# Altium PCB anssipv2.PcbDoc
Units mm, origin at the board's own origin, x right, y up, seen from the top; angles counter-clockwise.
Board outline 152.4 x 101.6 mm, 2 copper layers (Top Layer, Bottom Layer); 17 components, 28 nets, 98 pads, 10 vias.
Unrouted connection lines stored in the file: 4.
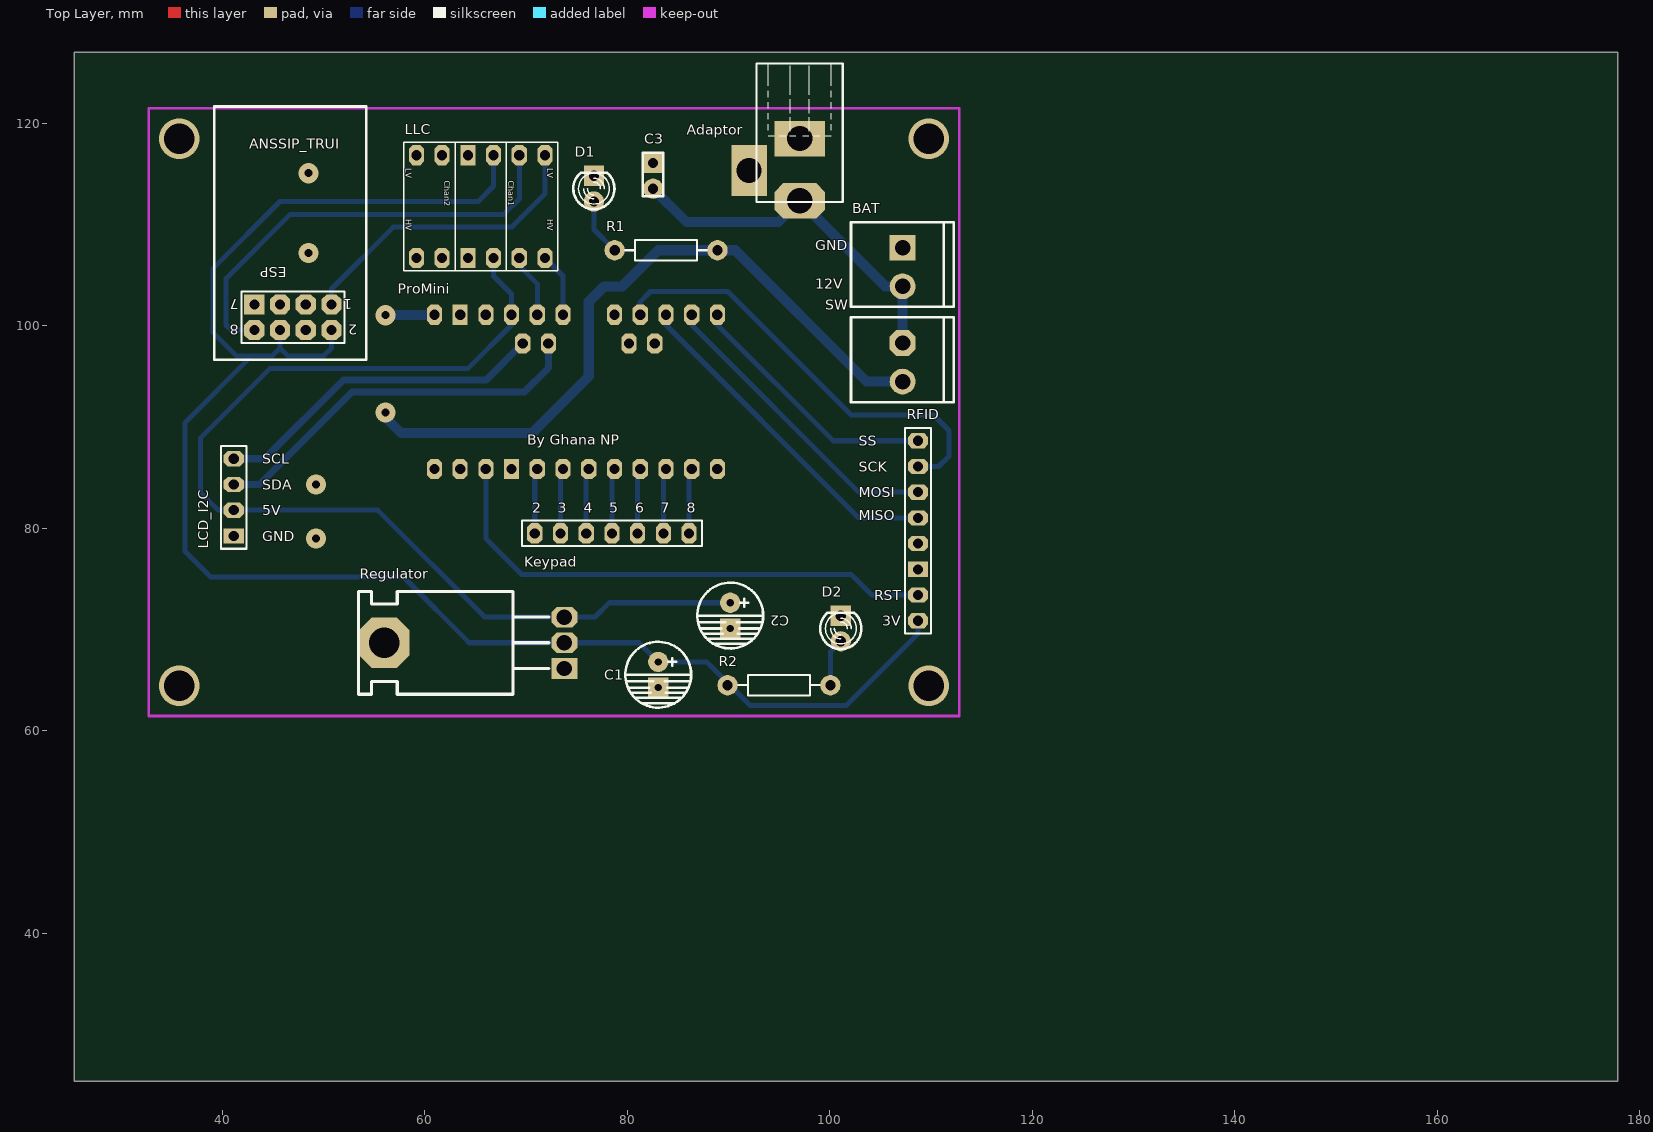
[diagram p0: Top Layer view]
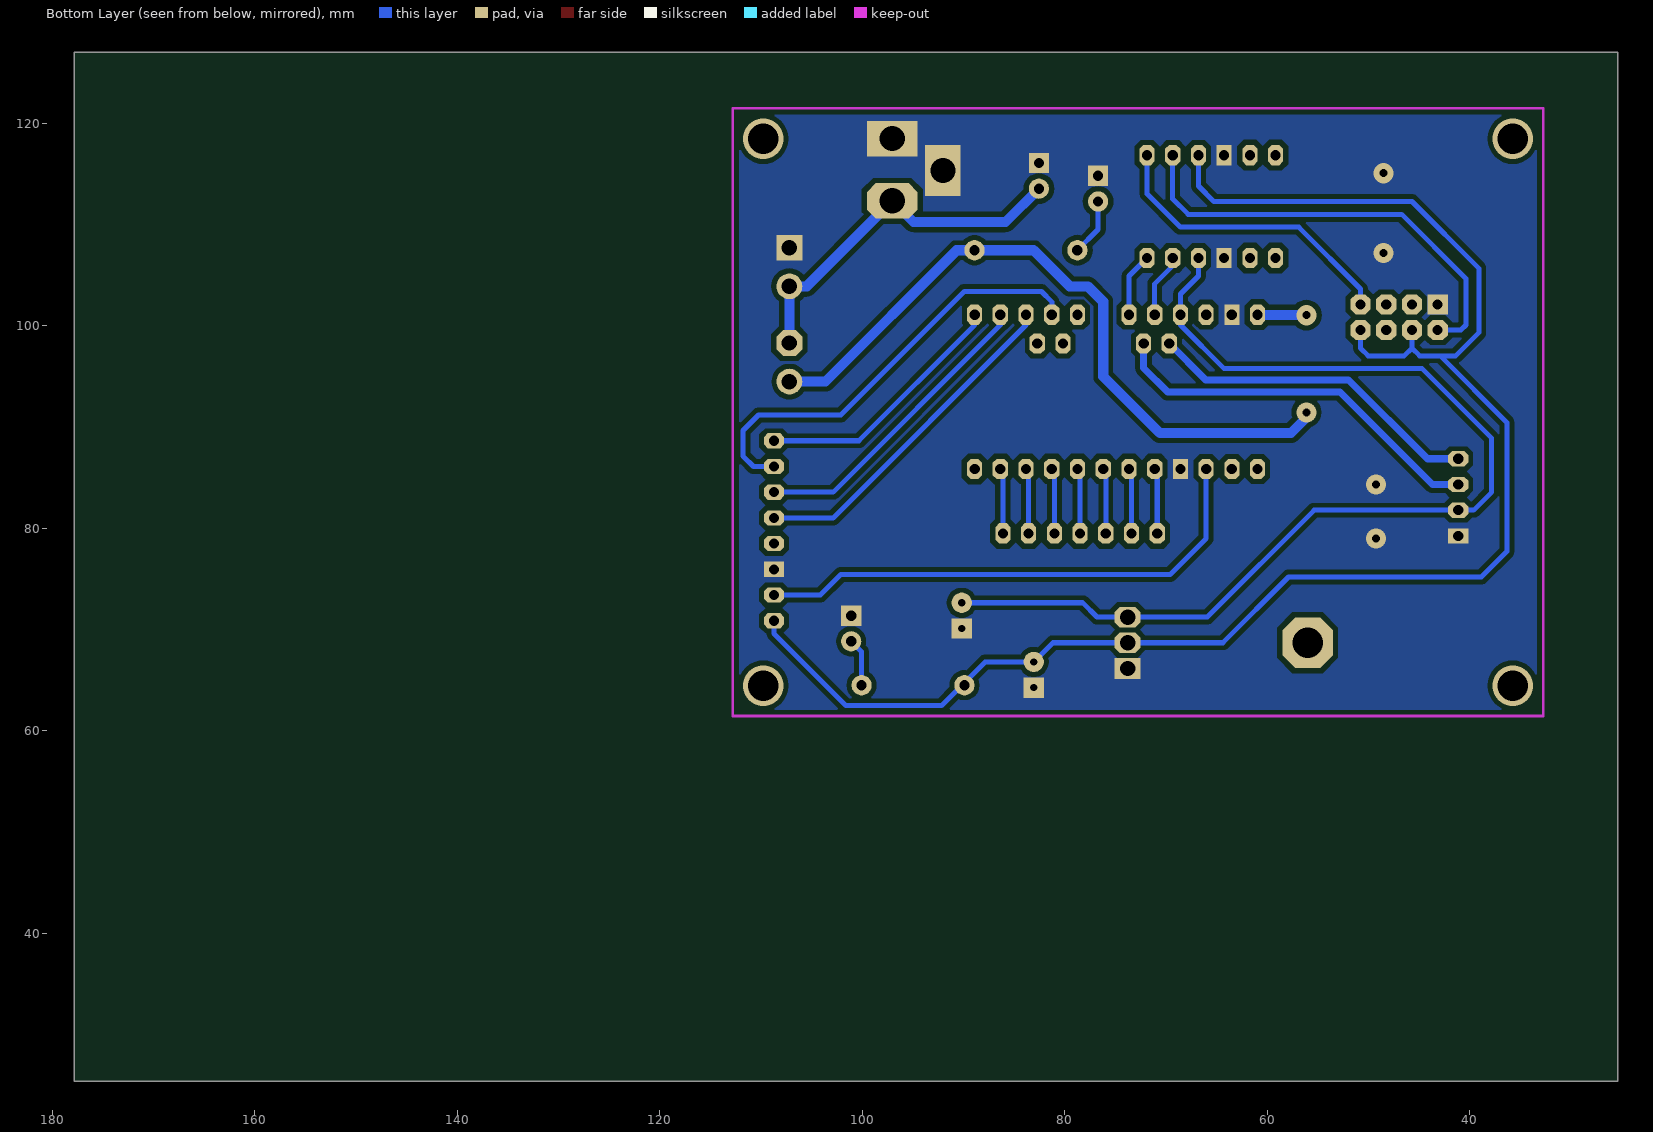
[diagram p1: Bottom Layer view, seen from below]

## Layer stack, top to bottom
Top Solder: solder mask 0.0102, Solder Resist, Dk 3.5
Top Layer: signal copper 0.0356
Dielectric 1: dielectric 0.32, FR-4, Dk 4.8
Bottom Layer: signal copper 0.0356
Bottom Solder: solder mask 0.0102, Solder Resist, Dk 3.5

## Board outline
25.4,25.4 177.8,25.4 177.8,127 25.4,127

## Design rules (kind name [scope] priority, off if disabled: settings)
Clearance [All] p1: gap=0.5
PolygonConnect [All] p1: connectstyle=Direct reliefconductorwidth=0.254 reliefentries=4 polygonreliefangle="90 Angle" airgapwidth=0.254
RoutingVias [All] p1: holewidth=0.711 width=1.27 viastyle="Through Hole" minholewidth=0.711 minwidth=1.27 maxholewidth=0.711 maxwidth=1.27
SolderMaskExpansion [All] p1: expansion=0.102
Width [All] p1: maxlimit=1 minlimit=0.4 preferedwidth=1 toplayer_minwidth=1 minimp=50.000000 maximp=50.000000 favimp=50.000000
29 further rules are at their usual default settings.

## Components (designator, comment, footprint, x,y, rotation, side; value= is the part's Value field where it differs from the comment)
Adaptor "DC_Jack" My_DC_Jack 97.028,120.904 r180 top
BAT "Power Connector" "My_ Power_Connector"#1 112.268,111.506 r270 top
C1 "10uF" "CAP 2.5/6.5" 83.058,65.532 r270 top
C2 "10uF" "CAP 2.5/6.5" 90.17,71.374 r270 top
C3 "Cap" My_cap100n 82.55,114.808 r270 top
D1 "LED" My_LED3MM 76.708,113.538 r90 top
D2 "LED" My_LED3MM 101.092,70.104 r90 top
ESP "Header 4X2" HDR2X4 50.8,102.108 r180 top
Keypad "Header 7" HDR1X7 70.866,79.502 r0 top
LCD_I2C "Header 4" HDR1X4 41.148,79.248 r90 top
LLC "" LOGIC_LEVEL_CONVERTER 57.912,118.11 r270 top
ProMini "ARDUINO_PRO_MINI" ARDUINO_PRO_MINI 73.66,93.472 r90 top
R1 "1k" My_axial-0.4 83.82,107.442 r180 top
R2 "1k" My_axial-0.4 94.996,64.516 r0 top
Regulator "Reg5to3" My_TO-220 73.787,66.167 r90 top
RFID "Header 8" HDR1X8 108.712,88.646 r270 top
SW "Power Connector" "My_ Power_Connector"#2 112.268,102.108 r270 top

## Footprints (in the part's own frame and the unit in brackets; to place one, negate y for a bottom-side part, rotate by r counter-clockwise, add the part's x,y. Pads: shape width x height; smd on the part's side, far side on the other; paste and mask are expansions set on the pad)
ARDUINO_PRO_MINI [mm]
  oct 2x1.5 hole 1.016: 1(-7.62,12.7) 2(-7.62,10.16) 3(-7.62,7.62) 5(-7.62,2.54) 6(-7.62,0) 7(-7.62,-2.54) 8(-7.62,-5.08) 9(-7.62,-7.62) 10(-7.62,-10.16) 11(-7.62,-12.7) 12(-7.62,-15.24) 13(7.62,-15.24) 14(7.62,-12.7) 15(7.62,-10.16) 16(7.62,-7.62) 17(7.62,-5.08) 19(7.62,0) 20(7.62,2.54) 21(7.62,5.08) 22(7.62,7.62) 24(7.62,12.7) A4(4.775,1.448) A5(4.775,3.988) A6(4.775,-9.049) A7(4.775,-6.509)
  rect 2x1.5 hole 1.016: 4(-7.62,5.08) 23(7.62,10.16)
  oct 0x0 all layers, no hole: 18(7.62,-2.54) BLK(-6.35,15.24) GND(-3.81,15.24) GRN(6.35,15.24) RXI(1.27,15.24) TXO(3.81,15.24) VCC(-1.27,15.24)
"CAP 2.5/6.5" [mm] "2.5*6.5mm"
  round 2 hole 0.7: 1(-1.27,0)
  rect 2x2 hole 0.7: 2(1.27,0)
  silkscreen extent -3.26,-3.25 3.24,3.25
HDR1X4 [mm] "Connector; Header; 4 Position"
  rect 1.5x2 hole 1: 1(0,0)
  oct 1.5x2 hole 1: 2(2.54,0) 3(5.08,0) 4(7.62,0)
  silkscreen extent -1.27,-1.27 8.89,1.27
HDR1X7 [mm] "Connector; Header; 7 Position"
  oct 1.5x2 hole 1: 1(0,0) 2(2.54,0) 3(5.08,0) 4(7.62,0) 5(10.16,0) 6(12.7,0) 7(15.24,0)
  silkscreen extent -1.27,-1.27 16.51,1.27
HDR1X8 [mm] "Connector; Header; 8 Position"
  oct 1.5x2 hole 1: 1(0,0) 2(2.54,0) 3(5.08,0) 4(7.62,0) 5(10.16,0) 7(15.24,0) 8(17.78,0)
  rect 1.5x2 hole 1: 6(12.7,0)
  silkscreen extent -1.27,-1.27 19.05,1.27
HDR2X4 [mm] "Connector; Header; 4x2 Position"
  oct 2x2 hole 1: 1(0,0) 2(0,2.54) 3(2.54,0) 4(2.54,2.54) 5(5.08,0) 6(5.08,2.54) 8(7.62,2.54)
  rect 2x2 hole 1: 7(7.62,0)
  silkscreen extent -1.27,-1.27 8.89,3.81
LOGIC_LEVEL_CONVERTER [mm]
  oct 2x1.5 hole 1: P$1(1.27,13.97) P$2(1.27,11.43) P$3(1.27,8.89) P$5(1.27,3.81) P$6(1.27,1.27) P$7(11.43,1.27) P$8(11.43,3.81) P$10(11.43,8.89) P$11(11.43,11.43) P$12(11.43,13.97)
  rect 2x1.5 hole 1: P$4(1.27,6.35) P$9(11.43,6.35)
  silkscreen extent 0,0 12.7,15.24
"My_ Power_Connector"#1 [mil]
  rect 100x100 hole 60: 1(150,-200)
  round 100 hole 60: 2(300,-200)
  silkscreen extent 50,-400 380,0
"My_ Power_Connector"#2 [mil]
  oct 100x100 hole 60: 1(150,-200)
  round 100 hole 60: 2(300,-200)
  silkscreen extent 50,-400 380,0
My_axial-0.4 [mil]
  round 78.74 hole 40: 1(-200.5,-0.5) 2(199.5,-0.5)
  silkscreen extent -160,-41 160,40
My_cap100n [mm]
  rect 2x2 hole 1.016: 1(-1.27,0)
  round 2 hole 1.016: 2(1.27,0)
  silkscreen extent -2.29,-1.02 2.03,1.02
My_DC_Jack [mm]
  oct 5x3.5 hole 2.5: 1(0,8.57)
  rect 3.5x5 hole 2.5: 2(5,5.57)
  rect 5x3.5 hole 2.5: 3(0,2.42)
  silkscreen extent -4.25,-4.98 4.25,8.67
My_LED3MM [mm]
  round 2 hole 1.016: A(-1.27,0)
  rect 2x2 hole 1.016: K(1.27,0)
  silkscreen extent -2.03,-2.03 1.57,2.03
My_TO-220 [mil]
  oct 196.85x196.85 hole 118.11: 0(99.49,699.49)
  rect 80x100 hole 60: 1(-0.5,-0.5)
  oct 80x100 hole 60: 2(99.5,-0.5) 3(199.5,-0.5)
  silkscreen extent -101,60 300,800

## Part data
BAT SW: "white Power Connector"
C1 C2: library part CAP2, "Electrolytic Capacitor"
C3: library part "Cap ceramic", "CAP-100Nf"
D1 D2: "Typical INFRARED GaAs LED"
ESP: "Header, 4-Pin, Dual row"
Keypad: "Header, 7-Pin"
LCD_I2C: "Header, 4-Pin"
LLC: library part LOGIC_LEVEL_CONVERTER
R1 R2: library part Res, "resistor 1/4 wat"
Regulator: library part 7805, "Regulator"
RFID: "Header, 8-Pin"

## Via types
v1: diameter 2, hole 0.8, Top Layer to Bottom Layer, 6 vias
v2: diameter 4, hole 3, Top Layer to Bottom Layer, 4 vias

## Nets (pads, with @x,y where several pads share a name; then routed paths per layer and width w, separated by ;. In a path a pad name is that pad's centre, name@x,y a point inside that pad or via, vN(x,y) a via of type N, cw(c..) or ccw(c..) an arc to the next point about the centre after c; other vN are vias at no path point)
2: Keypad.1 ProMini.5 | length 6.5
  Bottom Layer w0.5: Keypad.1 70.866,85.598 ProMini.5
3: Keypad.2 ProMini.6 | length 6.5
  Bottom Layer w0.5: Keypad.2 73.406,85.598 ProMini.6
3V: C1.1 ESP.2 ESP.6 LLC.P$3 R2.1 Regulator.2 RFID.8 | length 162.5
  Bottom Layer w0.5: ESP.6 45.72,97.79 ; ESP.2 50.8,97.79 50.038,97.028 46.482,97.028 45.72,97.79 ; LLC.P$3 66.802,113.792 65.278,112.268 45.72,112.268 39.116,105.664 39.116,99.314 41.402,97.028 42.926,97.028 ; RFID.8 108.712,69.596 101.6,62.484 92.177,62.484 87.859,66.802 C1.1 81.166,68.694 Regulator.2 64.402,68.694 57.912,75.184 38.862,75.184 36.322,77.724 36.322,90.424 42.926,97.028 ; 42.926,97.028 44.958,97.028 45.72,97.79
4: Keypad.3 ProMini.7 | length 6.1
  Bottom Layer w0.5: Keypad.3 ProMini.7@75.946,85.598
5: Keypad.4 ProMini.8 | length 6.1
  Bottom Layer w0.5: Keypad.4 ProMini.8@78.486,85.598
5V: C2.1 LCD_I2C.2 LLC.P$10 ProMini.21 Regulator.3 | length 106.1
  Bottom Layer w0.5: LLC.P$10 66.802,104.902 68.58,103.124 ProMini.21 68.58,100.076 64.262,95.758 44.704,95.758 37.846,88.9 37.846,83.566 39.624,81.788 LCD_I2C.2 55.372,81.788 65.926,71.234 Regulator.3 76.822,71.234 78.232,72.644 C2.1
6: Keypad.5 ProMini.9 | length 6.1
  Bottom Layer w0.5: Keypad.5 ProMini.9@81.026,85.598
7: Keypad.6 ProMini.10 | length 6.1
  Bottom Layer w0.5: Keypad.6 ProMini.10@83.566,85.598
8: Keypad.7 ProMini.11 | length 6.1
  Bottom Layer w0.5: Keypad.7 ProMini.11@86.106,85.598
9: ProMini.12
A0: ProMini.17
A1: ProMini.18
A2: LLC.P$12 ProMini.19 | length 6.3
  Bottom Layer w0.5: LLC.P$12 73.66,104.902 ProMini.19
A3: LLC.P$11 ProMini.20 | length 6.3
  Bottom Layer w0.5: LLC.P$11 69.342,105.918 71.12,104.14 ProMini.20
GND: Adaptor.2 Adaptor.3 BAT.1 C1.2 C2.2 C3.1 D1.K D2.K ESP.7 LCD_I2C.1 LLC.P$4 LLC.P$9 ProMini.4 ProMini.23 Regulator.1 RFID.6
  other v1: 49.276,78.994 49.276,84.328 48.514,107.188 48.514,115.062
MISO: ProMini.15 RFID.4 | length 33.8
  Bottom Layer w0.5: ProMini.15 83.82,100.076 102.87,81.026 RFID.4
MOSI: ProMini.14 RFID.3 | length 30.2
  Bottom Layer w0.5: ProMini.14 86.36,100.076 102.87,83.566 RFID.3
NetAdaptor_1: Adaptor.1 BAT.2 C3.2 SW.1 | length 36
  Bottom Layer w1: C3.2 85.852,110.236 94.93,110.236 Adaptor.1 105.476,103.886 BAT.2 SW.1
NetD1_A: D1.A R1.2 | length 5.7
  Bottom Layer w0.5: D1.A 76.708,109.499 R1.2
NetD2_A: D2.A R2.2 | length 4.8
  Bottom Layer w0.5: R2.2 100.063,67.805 D2.A
RAW: ProMini.24 R1.1 SW.2 | length 74.1
  Bottom Layer w0.5: v1@56.134,90.932 v1(56.134,91.44)
  Bottom Layer w1: v1@56.134,90.932 57.658,89.408 70.612,89.408 76.2,94.996 76.2,102.362 77.724,103.886 79.502,103.886 83.071,107.455 R1.1 90.665,107.455 103.632,94.488 SW.2 ; v1(56.134,101.048) ProMini.24@60.916,101.048
RST: ProMini.3 ProMini.22 RFID.7 | length 51.8
  Bottom Layer w0.5: ProMini.3 66.04,78.994 69.596,75.438 102.108,75.438 104.14,73.406 RFID.7
"RX LV": ESP.8 LLC.P$2 | length 44.1
  Bottom Layer w0.5: ESP.8 40.894,99.568 40.386,100.076 40.386,104.648 46.736,110.998 67.818,110.998 69.342,112.522 LLC.P$2
SCK: ProMini.16 RFID.2 | length 43.9
  Bottom Layer w0.5: ProMini.16 81.28,102.362 82.296,103.378 89.916,103.378 102.108,91.186 110.236,91.186 111.76,89.662 111.76,87.122 110.744,86.106 RFID.2
SCL: LCD_I2C.4 ProMini.A5 | length 33.2
  Bottom Layer w0.7: LCD_I2C.4 44.196,86.868 51.986,94.658 66.083,94.658 ProMini.A5
SDA: LCD_I2C.3 ProMini.A4 | length 38.2
  Bottom Layer w0.7: LCD_I2C.3 43.688,84.328 52.818,93.458 69.836,93.458 72.212,95.834 ProMini.A4
SS: ProMini.13 RFID.1 | length 25.6
  Bottom Layer w0.5: ProMini.13 88.9,100.076 100.33,88.646 RFID.1
"TX LV": ESP.1 LLC.P$1 | length 30.3
  Bottom Layer w0.5: ESP.1 50.8,103.632 56.896,109.728 68.58,109.728 71.882,113.03 LLC.P$1
pads on no net: ESP.3 ESP.4 ESP.5 LLC.P$5 LLC.P$6 LLC.P$7 LLC.P$8 ProMini.1 ProMini.2 ProMini.A6 ProMini.A7 ProMini.BLK ProMini.GND ProMini.GRN ProMini.RXI ProMini.TXO ProMini.VCC Regulator.0 RFID.5
copper on no net:
  other v2: 35.766,64.463 109.766,64.463 35.766,118.463 109.766,118.463

## Polygon pours and split planes (outlines as drawn)
GND on Bottom Layer "Bottom Layer-No Net" (solid, pour order 6): 32.766,121.158 112.461,121.158 112.766,121.463 112.766,61.463 32.766,61.463

## Keep-outs
Keep-Out Layer:
  lines w0.254: 32.766,62.611 32.766,62.865 ; 32.766,61.463 112.766,61.463 112.766,121.463 32.766,121.463 32.766,61.463

## Silkscreen, mask and mechanical layers (free items; w line width, h text height)
Top Overlay:
  lines w0.254: 39.229,96.647 39.229,121.647 54.229,121.647 54.229,96.647 39.229,96.647
  text "ANSSIP_TRUI" at 42.672,117.475 h1
  text "GND" at 98.552,107.442 h1
  text "12V" at 98.552,103.632 h1
  text "By Ghana NP" at 70.104,88.265 h1
  text "SS" at 102.87,88.138 h1
  text "SCL" at 43.942,86.36 h1
  text "SCK" at 102.87,85.598 h1
  text "SDA" at 43.942,83.82 h1
  text "MOSI" at 102.87,83.058 h1
  text "2" at 70.612,81.534 h1
  text "3" at 73.152,81.534 h1
  text "4" at 75.692,81.534 h1
  text "5" at 78.232,81.534 h1
  text "6" at 80.772,81.534 h1
  text "7" at 83.312,81.534 h1
  text "8" at 85.852,81.534 h1
  text "5V" at 43.942,81.28 h1
  text "MISO" at 102.87,80.772 h1
  text "GND" at 43.942,78.74 h1
  text "RST" at 104.394,72.898 h1
  text "3V" at 105.156,70.358 h1

## Text inside footprints (layer, text, board x,y; h text height)
ESP: Top Overlay "2" at 53.34,100.076 h1 r180; Top Overlay "1" at 52.832,102.616 h1 r180; Top Overlay "7" at 41.656,102.616 h1 r180; Top Overlay "8" at 41.656,100.076 h1 r180
LLC: Top Overlay "HV" at 57.912,110.49 h1 r270; Top Overlay "HV" at 71.882,110.49 h1 r270; Top Overlay "LV" at 57.912,115.57 h1 r270; Top Overlay "LV" at 71.882,115.57 h1 r270; Top Overlay "Chan2" at 61.722,114.3 h1 r270; Top Overlay "Chan1" at 68.072,114.3 h1 r270